# Altium PCB PCB2.PcbDoc
Units mil, origin at the board's own origin, x right, y up, seen from the top; angles counter-clockwise.
Board outline 3121 x 3601 mil, 2 copper layers (Top Layer, Bottom Layer); 116 components, 39 nets, 354 pads, 204 vias.
Unrouted connection lines stored in the file: 45.
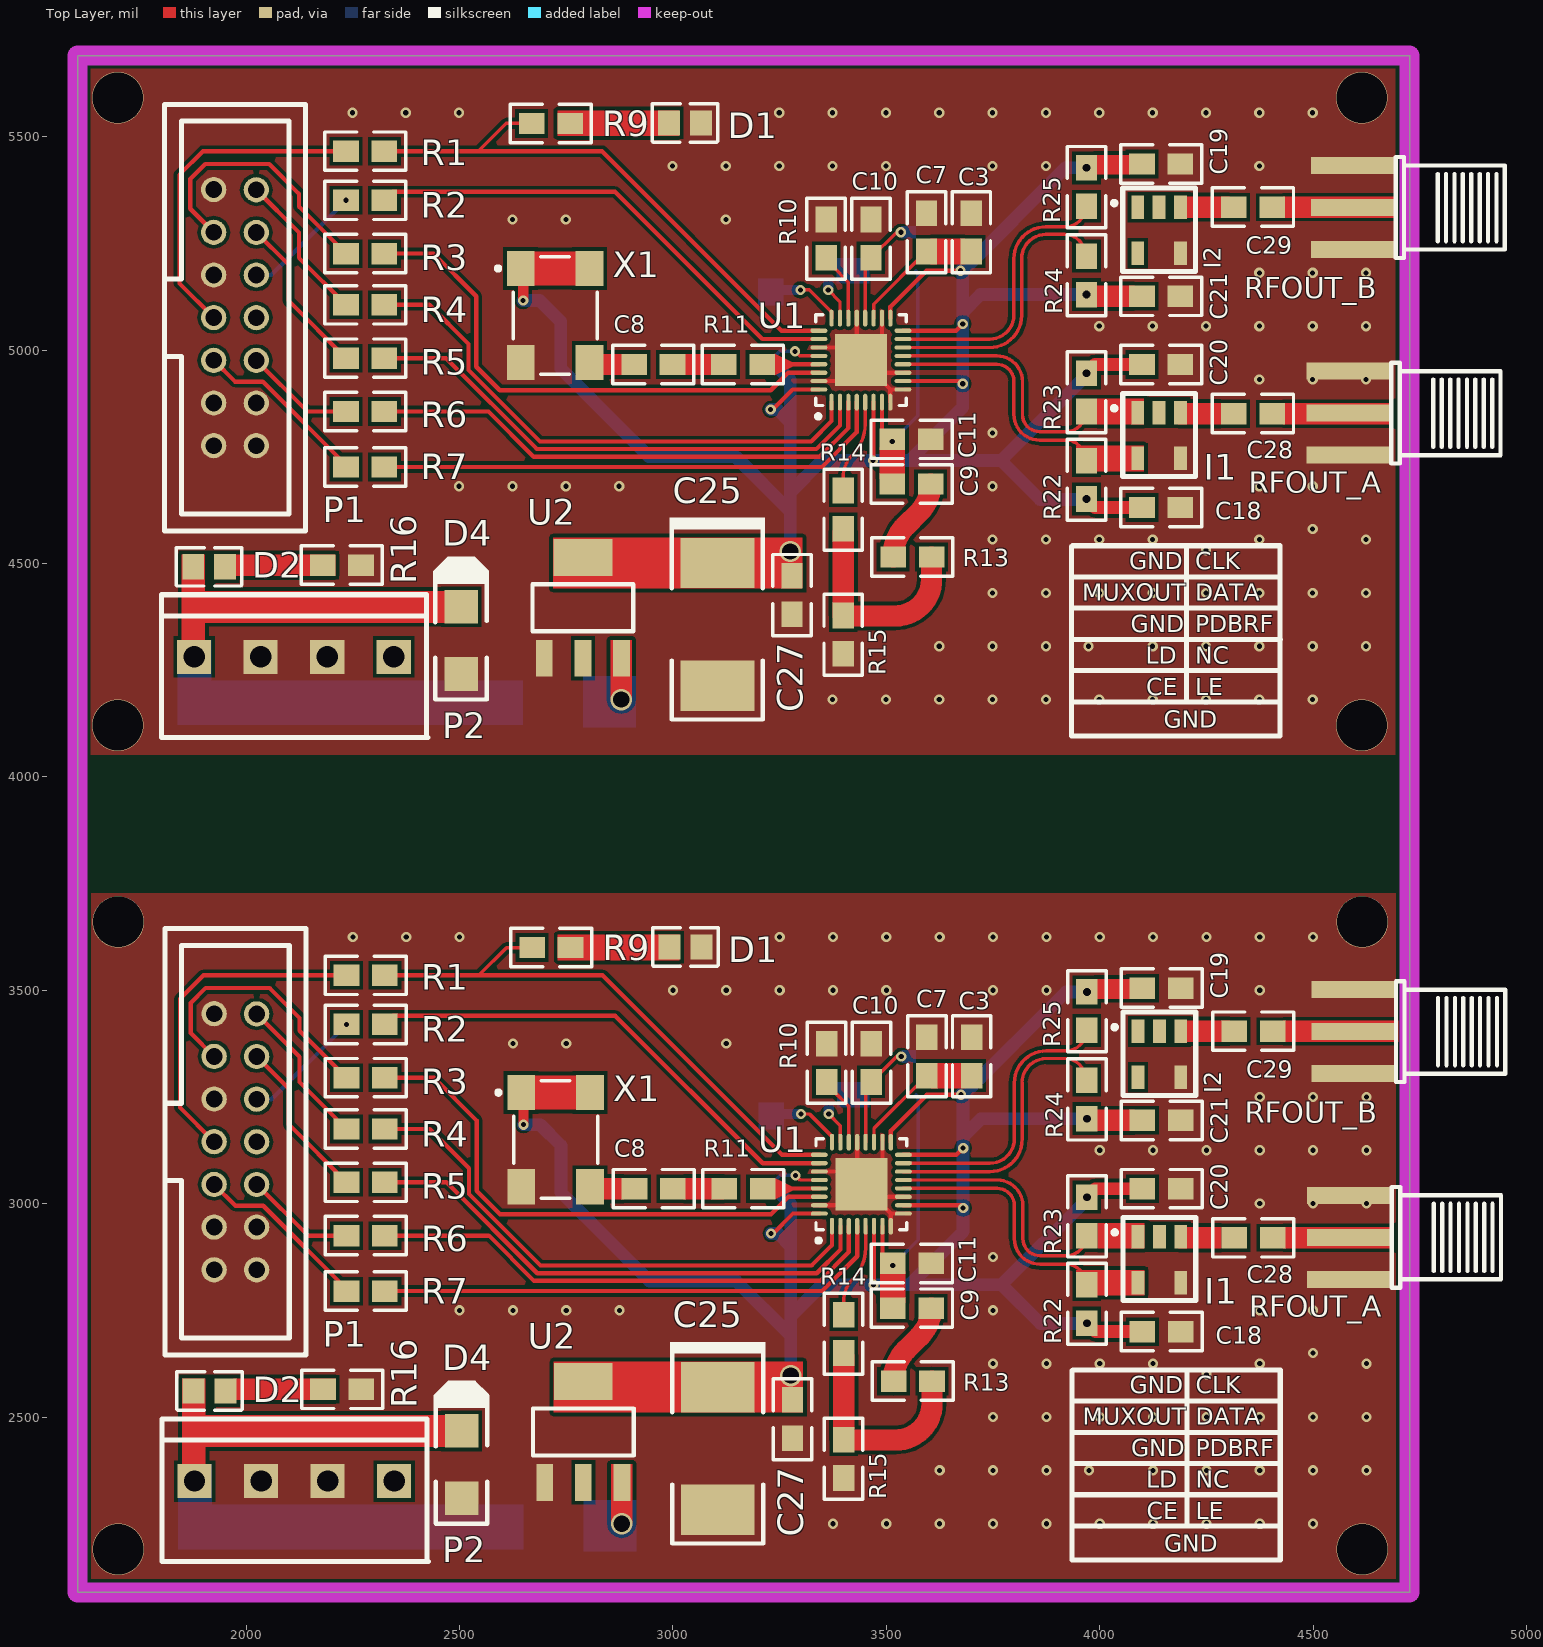
[diagram p0: Top Layer view]
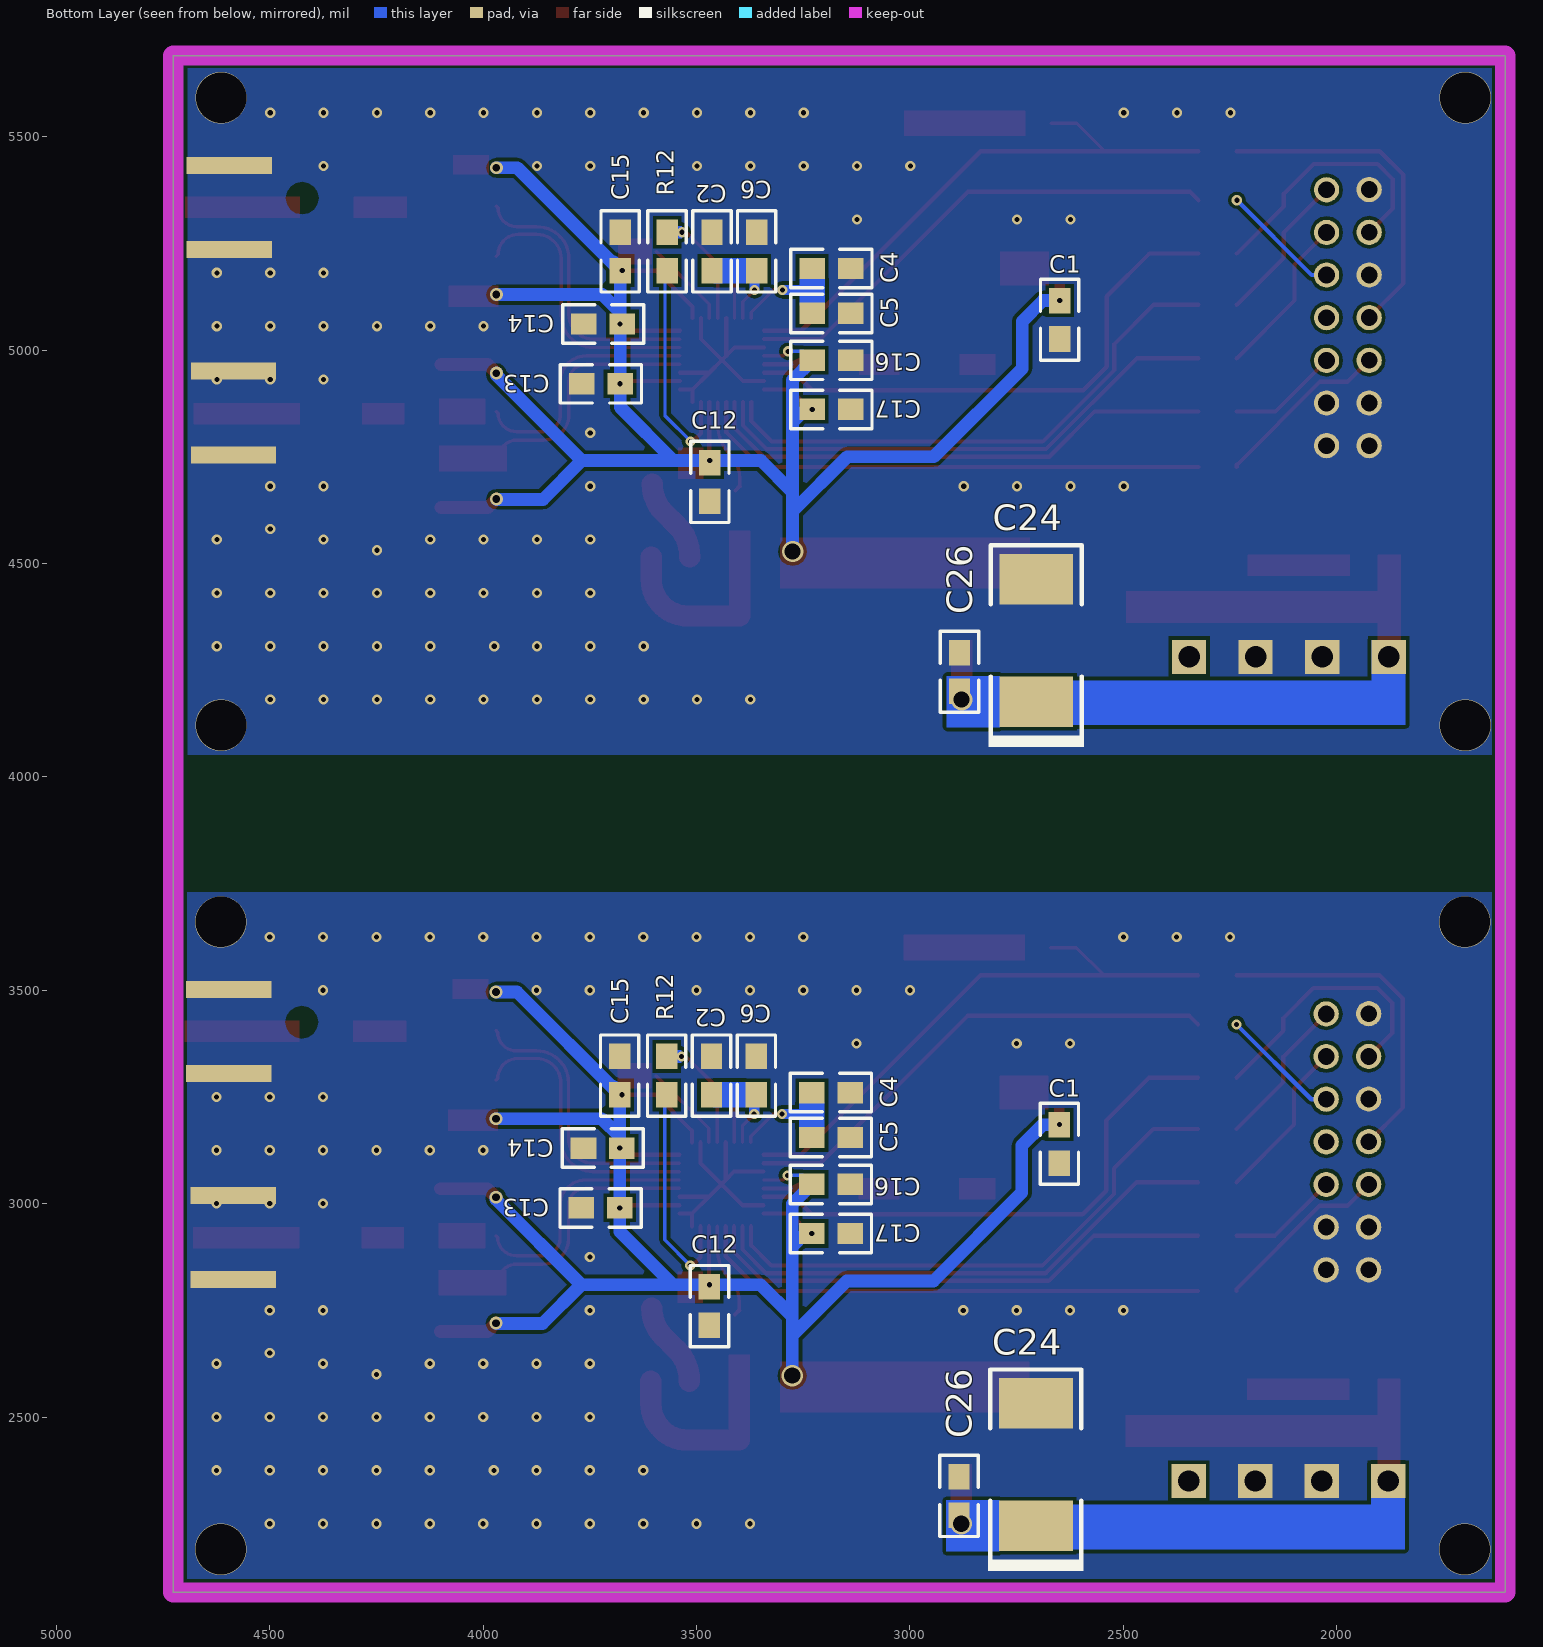
[diagram p1: Bottom Layer view, seen from below]

## Layer stack, top to bottom
Top Solder: solder mask 0.4, Solder Resist, Dk 3.5
Top Layer: signal copper 1.4
Dielectric 1: dielectric 12.6, FR-4, Dk 4.8
Bottom Layer: signal copper 1.4
Bottom Solder: solder mask 0.4, Solder Resist, Dk 3.5

## Board outline
1605,2089 4726,2089 4726,5690 1605,5690

## Design rules (kind name [scope] priority, off if disabled: settings)
Clearance [All] p1: gap=8
DiffPairsRouting [All] p1: maxlimit=10 minlimit=10 mostfreqgap=10 toplayer_minwidth=6 toplayer_maxwidth=15 toplayer_prefwidth=8 bottomlayer_minwidth=6 bottomlayer_maxwidth=15 bottomlayer_prefwidth=8 maxuncoupledlength=500
PlaneConnect [All] p1: planeconnectstyle=Direct reliefexpansion=20 reliefentries=4 reliefconductorwidth=10 reliefairgap=10
PolygonConnect [All] p1: connectstyle=Direct reliefconductorwidth=10 reliefentries=4 polygonreliefangle="90 Angle" airgapwidth=10
RoutingVias [All] p1: holewidth=28 width=50 viastyle="Through Hole" minholewidth=28 minwidth=50 maxholewidth=28 maxwidth=50
SolderMaskExpansion [All] p1: expansion=4
Width [All] p1: maxlimit=50 minlimit=6 preferedwidth=8
28 further rules are at their usual default settings.

## Classes and differential pairs
differential pair RFOUTA: +RFOUTA_P -RFOUTA_N
differential pair RFOUTB: +RFOUTB_P -RFOUTB_N

## Components (designator, comment, footprint, x,y, rotation, side; value= is the part's Value field where it differs from the comment)
C1 "0.1uf" 0805 2649,5026 r90 bottom
C1 "0.1uf" 0805 2650,3095 r90 bottom
C2 "0.1uf" 0805 3464,5276 r270 bottom
C2 "0.1uf" 0805 3465,3345 r270 bottom
C3 "0.1uf" 0805 3699,5321 r270 top
C3 "0.1uf" 0805 3700,3390 r270 top
C4 "0.1uf" 0805 3139,5191 r0 bottom
C4 "0.1uf" 0805 3140,3260 r0 bottom
C5 "100pf" 0805 3139,5086 r0 bottom
C5 "100pf" 0805 3140,3155 r0 bottom
C6 "100pf" 0805 3359,5276 r270 bottom
C6 "100pf" 0805 3360,3345 r270 bottom
C7 "100pf" 0805 3594,5321 r270 top
C7 "100pf" 0805 3595,3390 r270 top
C8 "100pf" 0805 2999,4966 r180 top
C8 "100pf" 0805 3000,3035 r180 top
C9 "39.6nf" 0805 3604,4686 r180 top
C9 "39.6nf" 0805 3605,2755 r180 top
C10 "1.33nf" 0805 3464,5306 r270 top
C10 "1.33nf" 0805 3465,3375 r270 top
C11 "2.91nF" 0805 3604,4791 r180 top
C11 "2.91nF" 0805 3605,2860 r180 top
C12 "100pf" 0805 3469,4646 r90 bottom
C12 "100pf" 0805 3470,2715 r90 bottom
C13 "100pf" 0805 3769,4921 r180 bottom
C13 "100pf" 0805 3770,2990 r180 bottom
C14 "100pf" 0805 3764,5061 r180 bottom
C14 "100pf" 0805 3765,3130 r180 bottom
C15 "100pf" 0805 3679,5276 r270 bottom
C15 "100pf" 0805 3680,3345 r270 bottom
C16 "100pf" 0805 3139,4976 r0 bottom
C16 "100pf" 0805 3140,3045 r0 bottom
C17 "100pf" 0805 3139,4861 r0 bottom
C17 "100pf" 0805 3140,2930 r0 bottom
C18 "100pf" 0805 4189,4631 r180 top
C18 "100pf" 0805 4190,2700 r180 top
C19 "100pf" 0805 4189,5436 r180 top
C19 "100pf" 0805 4190,3505 r180 top
C20 "100pf" 0805 4189,4966 r180 top
C20 "100pf" 0805 4190,3035 r180 top
C21 "100pf" 0805 4189,5126 r180 top
C21 "100pf" 0805 4190,3195 r180 top
C24 "Cap" 7343C-TYPE_D 2704,4176 r270 bottom
C24 "Cap" 7343C-TYPE_D 2705,2245 r270 bottom
C25 "Cap" 7343C-TYPE_D 3104,4501 r90 top
C25 "Cap" 7343C-TYPE_D 3105,2570 r90 top
C26 "100pf" 0805 2884,4291 r270 bottom
C26 "100pf" 0805 2885,2360 r270 bottom
C27 "100pf" 0805 3279,4381 r90 top
C27 "100pf" 0805 3280,2450 r90 top
C28 "1nf" 0805 4314,4851 r0 top
C28 "1nf" 0805 4315,2920 r0 top
C29 "1nf" 0805 4314,5335 r0 top
C29 "1nf" 0805 4315,3404 r0 top
D1 "LED" 0805_s 3049,5546 r0 top
D1 "LED" 0805_s 3050,3615 r0 top
D2 "LED" 0805_s 1934,4506 r0 top
D2 "LED" 0805_s 1935,2575 r0 top
D4 "5.6V" SMA/DO-214AC 2504,4241 r90 top
D4 "5.6V" SMA/DO-214AC 2505,2310 r90 top
I1 "ETC1-1-13TR" SM-22 4074,4718.5 r0 top
I1 "ETC1-1-13TR" SM-22 4075,2787.5 r0 top
I2 "ETC1-1-13TR" SM-22 4074,5199.5 r0 top
I2 "ETC1-1-13TR" SM-22 4075,3268.5 r0 top
P1 "DC-314P" DC3-14P 1808.65,5575.61 r270 top
P1 "DC-314P" DC3-14P 1809.65,3644.61 r270 top
P2 "VH3.96-4A" VH3.96-4P 1801.32,4426.67 r0 top
P2 "VH3.96-4A" VH3.96-4P 1802.32,2495.67 r0 top
R1 "30R" 0805 2234,5466 r0 top
R1 "30R" 0805 2235,3535 r0 top
R2 "30R" 0805 2234,5351 r0 top
R2 "30R" 0805 2235,3420 r0 top
R3 "30R" 0805 2234,5226 r0 top
R3 "30R" 0805 2235,3295 r0 top
R4 "30R" 0805 2234,5106 r0 top
R4 "30R" 0805 2235,3175 r0 top
R5 "30R" 0805 2234,4981 r0 top
R5 "30R" 0805 2235,3050 r0 top
R6 "30R" 0805 2234,4856 r0 top
R6 "30R" 0805 2235,2925 r0 top
R7 "30R" 0805 2234,4726 r0 top
R7 "30R" 0805 2235,2795 r0 top
R9 "1K" 0805 2669,5531 r0 top
R9 "1K" 0805 2670,3600 r0 top
R10 "4.7K" 0805 3359,5216 r90 top
R10 "4.7K" 0805 3360,3285 r90 top
R11 "30R" 0805 3209,4966 r180 top
R11 "30R" 0805 3210,3035 r180 top
R12 "23.0k" 0805 3569,5186 r90 bottom
R12 "23.0k" 0805 3570,3255 r90 bottom
R13 "0" 0805 3606,4515 r180 top
R13 "0" 0805 3607,2584 r180 top
R14 "120R" 0805 3399,4581 r90 top
R14 "120R" 0805 3400,2650 r90 top
R15 "11.3K" 0805 3399,4378 r270 top
R15 "11.3K" 0805 3400,2447 r270 top
R16 "10K" 0805 2269,4496 r180 top
R16 "10K" 0805 2270,2565 r180 top
R22 "49R9" 0805 3969,4741 r270 top
R22 "49R9" 0805 3970,2810 r270 top
R23 "49R9" 0805 3969,4946 r270 top
R23 "49R9" 0805 3970,3015 r270 top
R24 "49R9" 0805 3969,5130 r90 top
R24 "49R9" 0805 3970,3199 r90 top
R25 "49R9" 0805 3969,5427 r270 top
R25 "49R9" 0805 3970,3496 r270 top
RFOUT_A "差分输出" SMA-LYING 4644,4856 r180 top (schematic designator Vo_S1)
RFOUT_A "差分输出" SMA-LYING 4645,2925 r180 top (schematic designator Vo_S1)
RFOUT_B "差分输出" SMA-LYING 4654.06,5337.94 r180 top (schematic designator Vo_S2)
RFOUT_B "差分输出" SMA-LYING 4655.06,3406.94 r180 top (schematic designator Vo_S2)
U1 "ADI-ADF4351-CP-32-2" ADI-CP-32-2_M 3440.57,4976.47 r90 top
U1 "ADI-ADF4351-CP-32-2" ADI-CP-32-2_M 3441.57,3045.47 r90 top
U2 "AMS1117-3.3V" SOT-223 2789,4396 r270 top
U2 "AMS1117-3.3V" SOT-223 2790,2465 r270 top
X1 "XAL-100MHZ" SMD4_7050 2724,5081 r0 top
X1 "XAL-100MHZ" SMD4_7050 2725,3150 r0 top

## Footprints (in the part's own frame and the unit in brackets; to place one, negate y for a bottom-side part, rotate by r counter-clockwise, add the part's x,y. Pads: shape width x height; smd on the part's side, far side on the other; paste and mask are expansions set on the pad)
0805 [mil]
  rect 60x50 smd: 1(0,0) 2(90,0)
  silkscreen extent -50,-45 140,45
0805_s [mm]
  rect 1.3x1.499 smd: 1(0.425,-0.35) 2(-1.475,-0.35)
  silkscreen extent -2.47,-1.49 1.43,0.79
7343C-TYPE_D [mm]
  rect 3x4.4 smd: 1(0,0) 2(-7.3,0)
  silkscreen extent -9.31,-2.84 2.7,2.84
ADI-CP-32-2_M [mm] "QFN, 32-Leads, Body 5x5mm, Pitch 0.5mm, Thermal Pad 3.1x3.1mm, IPC Low Density"
  oval 1x0.25 smd: 1(-2.5,1.75) 2(-2.5,1.25) 3(-2.5,0.75) 4(-2.5,0.25) 5(-2.5,-0.25) 6(-2.5,-0.75) 7(-2.5,-1.25) 8(-2.5,-1.75) 17(2.5,-1.75) 18(2.5,-1.25) 19(2.5,-0.75) 20(2.5,-0.25) 21(2.5,0.25) 22(2.5,0.75) 23(2.5,1.25) 24(2.5,1.75)
  oval 0.25x1 smd: 9(-1.75,-2.5) 10(-1.25,-2.5) 11(-0.75,-2.5) 12(-0.25,-2.5) 13(0.25,-2.5) 14(0.75,-2.5) 15(1.25,-2.5) 16(1.75,-2.5) 25(1.75,2.5) 26(1.25,2.5) 27(0.75,2.5) 28(0.25,2.5) 29(-0.25,2.5) 30(-0.75,2.5) 31(-1.25,2.5) 32(-1.75,2.5)
  rect 3.1x3.1 smd: 33(0,0)
  silkscreen extent -3.47,-2.7 2.7,2.7, body extent -2.55,-2.55 2.55,2.55, height 1
DC3-14P [mm]
  round 1.5 hole 1: 1(5.07,2.93) 2(5.08,5.461) 3(7.61,2.93) 4(7.618,5.461) 5(10.15,2.93) 6(10.157,5.461) 7(12.69,2.93) 8(12.695,5.461) 9(15.23,2.93) 10(15.233,5.461) 11(17.77,2.93) 12(17.772,5.461) 13(20.31,2.93) 14(20.31,5.461)
  silkscreen extent 0,0 25.38,8.4
SM-22 [mil]
  rect 30x55 smd: 1(15,135) 2(65,135) 3(115,135) 4(115,27.5) 5(15,27.5)
  silkscreen extent -45,-15 150,180
SMA-LYING [mm]
  rect 5.08x1.016 smd: 0(1.5,0.1) 1(1.5,2.6) 1(1.5,-2.4)
  rect 5.08x1.016 smd far side: 1(1.5,2.6) 1(1.5,-2.4)
  silkscreen extent -7.5,-2.9 -1,3.1
SMA/DO-214AC [mm]
  rect 2x2 smd: 1(0,0) 2(4,0)
  silkscreen extent -1.52,-1.52 6.86,1.55
SMD4_7050 [mm]
  rect 1.65x2.1 smd: 1(-2.05,2.8) 2(-2.05,-2.8) 3(2.05,-2.8) 4(2.05,2.8)
  silkscreen extent -3.52,-3.5 2.5,3.5
SOT-223 [mm]
  rect 2.2x1 smd: 1(3,-2.3) 2(3,0) 3(3,2.3)
  rect 2.2x3.5 smd: 2(-3,0)
  silkscreen extent -1.4,-3 1.4,3, body extent -3.49,-3.24 3.49,3.24, height 1.64
VH3.96-4P [mil]
  rect 80x80 hole 50: 1(76.77,-145.67) 2(232.68,-145.67) 3(388.58,-145.67) 4(544.49,-145.67)
  silkscreen extent 0,-335 625,0

## Part data
C1 C1 C2 C2 C3 C3 C4 C4 C5 C5 C6 C6 C7 C7 C8 C8 C9 C9 C10 C10 C11 C11 C12 C12 C13 C13 C14 C14 C15 C15 C16 C16 C17 C17 C18 C18 C19 C19 C20 C20 C21 C21 C26 C26 C27 C27 C28 C28 C29 C29: library part Cap
C24 C24 C25 C25: library part "Tantalium Cap"
D4 D4: library part 肖特基-5.6V
P1 P1: library part DC3-14P
R1 R1 R2 R2 R3 R3 R4 R4 R5 R5 R6 R6 R7 R7 R9 R9 R10 R10 R11 R11 R12 R12 R13 R13 R14 R14 R15 R15 R16 R16 R22 R22 R23 R23 R24 R24 R25 R25: library part Res
RFOUT_A RFOUT_A RFOUT_B RFOUT_B: library part SMA
X1 X1: library part XAL

## Via types
v1: diameter 24, hole 12, Top Layer to Bottom Layer, 184 vias
v2: diameter 120.08, hole 118.11, Top Layer to Bottom Layer, 8 vias
v3: diameter 30, hole 18, Top Layer to Bottom Layer, 8 vias
v4: diameter 50, hole 38, Top Layer to Bottom Layer, 4 vias

## Nets (pads, with @x,y where several pads share a name; then routed paths per layer and width w, separated by ;. In a path a pad name is that pad's centre, name@x,y a point inside that pad or via, vN(x,y) a via of type N, cw(c..) or ccw(c..) an arc to the next point about the centre after c; other vN are vias at no path point)
3.3V: C1.2 C12.2 C13.2 C14.2 C15.2 C16.2 C17.2 C18.2 C19.2 C20.2 C21.2 C25.1 C27.2 R22.2 R23.1 R24.1 R25.1 U1.6 U1.10 U1.16 U1.17 U1.28 U1.32 U2.2 X1.1 X1.4 | length 9764.1
  Top Layer w8: v1(3286,4997) 3296.69,4986.31 U1.28@3342.15,4986.31 ; v1(3287,3066) 3297.69,3055.31 U1.28@3343.15,3055.31
  Top Layer w10: v1(3229,4861) 3234,4861 3280.57,4907.57 U1.32@3342.15,4907.57 ; v1(3230,2930) 3235,2930 3281.57,2976.57 U1.32@3343.15,2976.57 ; v1(3469,4741) 3470.1,4742.1 U1.6@3470.1,4878.05 ; v1(3470,2810) 3471.1,2811.1 U1.6@3471.1,2947.05 ; U1.17@3509.47,5074.9 3509.47,5101.47 3594,5186 v1(3674,5186) ; U1.17@3510.47,3143.9 3510.47,3170.47 3595,3255 v1(3675,3255) ; U1.10@3539,4927.26 3672.74,4927.26 v1(3679,4921) ; U1.16@3539,5045.37 3663.37,5045.37 v1(3679,5061) ; U1.10@3540,2996.26 3673.74,2996.26 v1(3680,2990) ; U1.16@3540,3114.37 3664.37,3114.37 v1(3680,3130)
  Top Layer w30: v3(3969,4651) 3989,4631 C18.2@4099,4631 ; v3(3969,4946) 3989,4966 C20.2@4099,4966 ; v3(3970,2720) 3990,2700 C18.2@4100,2700 ; v3(3970,3015) 3990,3035 C20.2@4100,3035
  Bottom Layer w8: C16.2@3229,4976 3250,4997 v1(3286,4997) ; C16.2@3230,3045 3251,3066 v1(3287,3066)
  Bottom Layer w30: v1(2649,5116) 2688,5116 2737,5067 2737,4957 2944,4750 3147,4750 3275,4622 ; v1(2650,3185) 2689,3185 2738,3136 2738,3026 2945,2819 3148,2819 3276,2691 ; v1(3229,4861) 3245,4861 3275,4831 ; C16.2@3229,4976 3275,4930 3275,4831 ; v1(3230,2930) 3246,2930 3276,2900 ; C16.2@3230,3045 3276,2999 3276,2900 ; v4(3275,4528) 3275,4622 ; v4(3276,2597) 3276,2691 ; C15.2@3679,5186 3920,5427 v3(3969,5427) ; C15.2@3680,3255 3921,3496 v3(3970,3496) ; C15.2@3694,5206 v1(3674,5186) 3679,5181 3679,5088 ; C15.2@3695,3275 v1(3675,3255) 3680,3250 3680,3157 ; v3@3968,4650 3860,4650 3769,4741 ; v3@3969,2719 3861,2719 3770,2810 ; v3(3969,4946) 3969,4941 3769,4741 ; v3(3969,5130) 3721,5130 3679,5088 ; v3(3970,3015) 3970,3010 3770,2810 ; v3(3970,3199) 3722,3199 3680,3157 ; 3275,4622 3275,4667 ; 3275,4667 3275,4831 ; 3275,4667 3349,4741 v1(3469,4741) 3554,4741 ; 3276,2691 3276,2736 ; 3276,2736 3350,2810 v1(3470,2810) 3555,2810 ; 3276,2736 3276,2900 ; 3554,4741 3769,4741 ; 3554,4741 3679,4866 v1(3679,4921) v1(3679,5061) 3679,5088 ; 3555,2810 3680,2935 v1(3680,2990) v1(3680,3130) 3680,3157 ; 3555,2810 3770,2810
CE: R7.2 U1.4 | length 2421.8
  Top Layer w10: R7.2@2324,4726 3349,4726 3430.73,4807.73 U1.4@3430.73,4878.05 ; R7.2@2325,2795 3350,2795 3431.73,2876.73 U1.4@3431.73,2947.05
"CE D": P1.9 R7.1 | length 833
  Top Layer w10: P1.9@1924,4976 1974,4926 2039,4926 2234,4731 R7.1@2234,4726 ; P1.9@1925,3045 1975,2995 2040,2995 2235,2800 R7.1@2235,2795
CLK: R4.2 U1.1 | length 2559.5
  Top Layer w10: R4.2@2324,5106 2429,5106 2521,5014 2521,4953.54 2688.54,4786 3324,4786 3371.68,4833.68 U1.1@3371.68,4878.05 ; R4.2@2325,3175 2430,3175 2522,3083 2522,3022.54 2689.54,2855 3325,2855 3372.68,2902.68 U1.1@3372.68,2947.05
"CLK D": P1.2 R4.1 | length 713.5
  Top Layer w10: P1.2@2023.65,5375.61 2124,5275.25 2124,5216 R4.1@2234,5106 ; P1.2@2024.65,3444.61 2125,3344.25 2125,3285 R4.1@2235,3175
CP: C9.2 C11.2 R12.1 U1.7 | length 1069.7
  Top Layer w10: U1.7@3489.79,4878.05 3489.79,4805.21 3504,4791 3514,4791 C11.2@3519,4791 ; U1.7@3490.79,2947.05 3490.79,2874.21 3505,2860 3515,2860 C11.2@3520,2860
  Bottom Layer w8: v1(3514,4786) 3574,4846 3574,5181 R12.1@3569,5186 ; v1(3515,2855) 3575,2915 3575,3250 R12.1@3570,3255
DATA: R5.2 U1.2 | length 2466.4
  Top Layer w10: R5.2@2324,4981 2468.09,4981 2681.09,4768 3336,4768 3391.36,4823.36 U1.2@3391.36,4878.05 ; R5.2@2325,3050 2469.09,3050 2682.09,2837 3337,2837 3392.36,2892.36 U1.2@3392.36,2947.05
"DATA D": P1.4 R5.1 | length 763.6
  Top Layer w10: P1.4@2023.65,5275.67 2099,5200.32 2099,5116 R5.1@2234,4981 ; P1.4@2024.65,3344.67 2100,3269.32 2100,3185 R5.1@2235,3050
GND: C1.1 C2.1 C3.1 C4.1 C5.1 C6.1 C7.1 C10.1 C11.1 C12.1 C13.1 C14.1 C15.1 C16.1 C17.1 C18.1 C19.1 C20.1 C21.1 C24.2 C25.2 C26.1 C27.1 D1.1 D4.1 I1.4 I2.4 P1.1 P1.5 P1.11 P1.12 P1.13 P1.14 P2.2 P2.3 R10.2 R15.2 R16.1 RFOUT_A.1 RFOUT_B.1 U1.8 U1.9 U1.11 U1.18 U1.21 U1.27 U1.31 U1.33 U2.1 X1.2 | length 1324.5
  Top Layer w10: U1.31@3342.15,4927.26 3391.36,4927.26 U1.33@3440.57,4976.47 ; U1.27@3342.15,5006 3411.05,5006 U1.33@3430.73,4986.31 ; U1.31@3343.15,2996.26 3392.36,2996.26 U1.33@3441.57,3045.47 ; U1.27@3343.15,3075 3412.05,3075 U1.33@3431.73,3055.31 ; U1.21@3430.73,5074.9 U1.33@3430.73,4986.31 ; U1.21@3431.73,3143.9 U1.33@3431.73,3055.31 ; U1.18@3489.79,5074.9 3489.79,5025.69 U1.33@3440.57,4976.47 ; U1.18@3490.79,3143.9 3490.79,3094.68 U1.33@3441.57,3045.47 ; U1.8@3509.47,4878.05 3509.47,4907.57 ; U1.8@3510.47,2947.05 3510.47,2976.57 ; U1.9@3539,4907.57 3509.47,4907.57 ; U1.11@3539,4946.94 U1.33@3470.1,4946.94 ; U1.9@3540,2976.57 3510.47,2976.57 ; U1.11@3540,3015.94 U1.33@3471.1,3015.94 ; U1.33@3430.73,4986.31 U1.33@3440.57,4976.47 ; U1.33@3431.73,3055.31 U1.33@3441.57,3045.47 ; U1.33@3440.57,4976.47 U1.33@3470.1,4946.94 ; U1.33@3441.57,3045.47 U1.33@3471.1,3015.94 ; U1.33@3470.1,4946.94 3509.47,4907.57 ; U1.33@3471.1,3015.94 3510.47,2976.57
  other v1: 3375,2250 3500,2250 3625,2250 3750,2250 3875,2250 4000,2250 4125,2250 4250,2250 4375,2250 4500,2250 3625,2375 3750,2375 3875,2375 3975,2375 4125,2375 4250,2375 4375,2375 4500,2375 4625,2375 3750,2500 3875,2500 4000,2500 4125,2500 4250,2500 4375,2500 4500,2500 4625,2500 4250,2600 3750,2625 3875,2625 4000,2625 4125,2625 4375,2625 4625,2625 4500,2650 2500,2750 2625,2750 2750,2750 2875,2750 3750,2750 4375,2750 4500,2750 3750,2875 4375,3000 4500,3000 4625,3000 4000,3125 4125,3125 4250,3125 4375,3125 4500,3125 4625,3125 4375,3250 4500,3250 4625,3250 2625,3375 2750,3375 3125,3375 3000,3500 3125,3500 3250,3500 3375,3500 3500,3500 3750,3500 3875,3500 4375,3500 2250,3625 2375,3625 2500,3625 3250,3625 3375,3625 3500,3625 3625,3625 3750,3625 3875,3625 4000,3625 4125,3625 4250,3625 4375,3625 4500,3625 3374,4181 3499,4181 3624,4181 3749,4181 3874,4181 3999,4181 4124,4181 4249,4181 4374,4181 4499,4181 3624,4306 3749,4306 3874,4306 3974,4306 4124,4306 4249,4306 4374,4306 4499,4306 4624,4306 3749,4431 3874,4431 3999,4431 4124,4431 4249,4431 4374,4431 4499,4431 4624,4431 4249,4531 3749,4556 3874,4556 3999,4556 4124,4556 4374,4556 4624,4556 4499,4581 2499,4681 2624,4681 2749,4681 2874,4681 3749,4681 4374,4681 4499,4681 3749,4806 4374,4931 4499,4931 4624,4931 3999,5056 4124,5056 4249,5056 4374,5056 4499,5056 4624,5056 4374,5181 4499,5181 4624,5181 2624,5306 2749,5306 3124,5306 2999,5431 3124,5431 3249,5431 3374,5431 3499,5431 3749,5431 3874,5431 4374,5431 2249,5556 2374,5556 2499,5556 3249,5556 3374,5556 3499,5556 3624,5556 3749,5556 3874,5556 3999,5556 4124,5556 4249,5556 4374,5556 4499,5556
  other v2: 1700,2190 4615,2190 1700,3660 4615,3660 1699,4121 4614,4121 1699,5591 4614,5591
LD: R1.2 R9.1 U1.25 | length 2688.6
  Top Layer w8: 2544,5466 2609,5531 R9.1@2669,5531 ; 2545,3535 2610,3600 R9.1@2670,3600
  Top Layer w10: R1.2@2324,5466 2544,5466 2834,5466 3254.63,5045.37 U1.25@3342.15,5045.37 ; R1.2@2325,3535 2545,3535 2835,3535 3255.63,3114.37 U1.25@3343.15,3114.37
"LD D": P1.7 R1.1 | length 1561.8
  Top Layer w10: P1.7@1924,5076 1844,5156 1844,5411 1899,5466 R1.1@2234,5466 ; P1.7@1925,3145 1845,3225 1845,3480 1900,3535 R1.1@2235,3535
LE: R6.2 U1.3 | length 2438.8
  Top Layer w10: R6.2@2324,4856 2567.63,4856 2673.63,4750 3343.46,4750 3411.05,4817.59 U1.3@3411.05,4878.05 ; R6.2@2325,2925 2568.63,2925 2674.63,2819 3344.46,2819 3412.05,2886.59 U1.3@3412.05,2947.05
"LE D": P1.10 R6.1 | length 520
  Top Layer w10: P1.10@2023.65,4975.87 2143.51,4856 R6.1@2234,4856 ; P1.10@2024.65,3044.87 2144.51,2925 R6.1@2235,2925
MUXOUT: R3.2 U1.30 | length 2528.6
  Top Layer w10: R3.2@2324,5226 2439,5226 2539,5126 2539,4961 2594,4906 3229,4906 3269.94,4946.94 U1.30@3342.15,4946.94 ; R3.2@2325,3295 2440,3295 2540,3195 2540,3030 2595,2975 3230,2975 3270.94,3015.94 U1.30@3343.15,3015.94
"MUXOUT D": P1.3 R3.1 | length 1263.7
  Top Layer w10: P1.3@1924,5276 1869,5331 1869,5401 1904,5436 2054,5436 2124,5366 2124,5336 R3.1@2234,5226 ; P1.3@1925,3345 1870,3400 1870,3470 1905,3505 2055,3505 2125,3435 2125,3405 R3.1@2235,3295
NetC8_1: C8.1 R11.2
NetC8_2: C8.2 X1.3
NetC9_1: C9.1 R13.2 | length 398.2
  Top Layer w50: R13.2@3516,4515 3516,4517.58 cw(c3616,4517.58) 3545.29,4588.29 3576.42,4619.42 ccw(c3509.85,4686) C9.1@3604,4686 ; R13.2@3517,2584 3517,2586.58 cw(c3617,2586.58) 3546.29,2657.29 3577.42,2688.42 ccw(c3510.85,2755) C9.1@3605,2755
NetC24_1: C24.1 C26.2 D2.2 D4.2 P2.1 U2.3
  other v4: 2880,2250 2879,4181
NetC28_1: C28.1 I1.3
NetC28_2: C28.2 RFOUT_A.0
NetC29_1: C29.1 I2.3
NetC29_2: C29.2 RFOUT_B.0
NetD1_2: D1.2 R9.2
NetD2_1: D2.1 R16.2
NetR13_1: R13.1 R14.1 R15.1 | length 618.2
  Top Layer w50: R15.1@3399,4378 ccw(c3400,4378) 3400,4377 3521,4377 ccw(c3521,4462) 3606,4462 R13.1@3606,4515 ; R15.1@3400,2447 ccw(c3401,2447) 3401,2446 3522,2446 ccw(c3522,2531) 3607,2531 R13.1@3607,2584
PDBRF: R2.2 U1.26 | length 2338.9
  Top Layer w10: R2.2@2324,5351 2344,5371 2864,5371 3209.32,5025.69 U1.26@3342.15,5025.69 ; R2.2@2325,3420 2345,3440 2865,3440 3210.32,3094.68 U1.26@3343.15,3094.68
"PDBRF D": P1.6 R2.1 | length 565.9
  Bottom Layer w10: P1.6@2023.65,5175.74 2058.74,5175.74 v1(2234,5351) ; P1.6@2024.65,3244.74 2059.74,3244.74 v1(2235,3420)
REFIN: R11.1 U1.29 | length 266.8
  Top Layer w10: R11.1@3209,4966 3209.63,4966.63 U1.29@3342.15,4966.63 ; R11.1@3210,3035 3210.63,3035.63 U1.29@3343.15,3035.63
RFOUTA_N: I1.1 R23.2 U1.13 | length 1198.7
  Top Layer w8: U1.13@3539,4986.31 3756.69,4986.31 ; U1.13@3540,3055.31 3757.69,3055.31 ; 3759,4986.31 cw(c3759,4926.31) 3819,4926.31 3819,4849 ccw(c3859,4849) 3859,4809 3922,4809 ccw(c3922,4852) 3965,4852 3969,4856 ccw(c3978.66,4846.34) 3965,4846.34 R23.2@3965,4846 ; 3760,3055.32 cw(c3760,2995.32) 3820,2995.32 3820,2918 ccw(c3860,2918) 3860,2878 3923,2878 ccw(c3923,2921) 3966,2921 3970,2925 ccw(c3979.66,2915.34) 3966,2915.34 R23.2@3966,2915
RFOUTA_P: I1.5 R22.1 U1.12 | length 1203.2
  Top Layer w8: U1.12@3539,4966.63 3758.37,4966.63 ; U1.12@3540,3035.63 3759.37,3035.63 ; 3759,4966.63 cw(c3759,4926.63) 3799,4926.63 3799,4849 ccw(c3859,4849) 3859,4789 3921,4789 cw(c3921,4745) 3965,4745 3969,4741 ccw(c3959.34,4731.34) R22.1@3959.34,4745 ; 3760,3035.63 cw(c3760,2995.63) 3800,2995.63 3800,2918 ccw(c3860,2918) 3860,2858 3922,2858 cw(c3922,2814) 3966,2814 3970,2810 ccw(c3960.34,2800.34) R22.1@3960.34,2814
RFOUTB_N: I2.1 R25.2 U1.15 | length 1336.1
  Top Layer w8: U1.15@3539,5025.69 3738.93,5025.69 ; U1.15@3540,3094.68 3739.93,3094.68 ; 3742,5025.69 ccw(c3742,5082.69) 3799,5082.69 ; 3743,3094.68 ccw(c3743,3151.68) 3800,3151.68 ; 3799,5085.75 3799,5214 cw(c3874,5214) 3874,5289 3921,5289 ccw(c3921,5333) 3965,5333 3969,5337 ccw(c3978.66,5327.34) R25.2@3965,5327.34 ; 3800,3154.75 3800,3283 cw(c3875,3283) 3875,3358 3922,3358 ccw(c3922,3402) 3966,3402 3970,3406 ccw(c3979.66,3396.34) R25.2@3966,3396.34
RFOUTB_P: I2.5 R24.2 U1.14 | length 1333.7
  Top Layer w8: U1.14@3539,5006 3742,5006 ccw(c3742,5081) 3817,5081 3817,5214 cw(c3874,5214) 3874,5271 3918,5271 cw(c3918,5224) 3965,5224 R24.2@3969,5220 ; U1.14@3540,3075 3743,3075 ccw(c3743,3150) 3818,3150 3818,3283 cw(c3875,3283) 3875,3340 3919,3340 cw(c3919,3293) 3966,3293 R24.2@3970,3289
RSET: R10.1 U1.22 | length 272.9
  Top Layer w8: R10.1@3374,5196 3411.05,5158.95 U1.22@3411.05,5074.9 ; R10.1@3375,3265 3412.05,3227.95 U1.22@3412.05,3143.9
SW: R14.2 U1.5 | length 449.9
  Top Layer w8: R14.2@3399,4681 3399,4701.71 cw(c3474.55,4701.71) 3421.13,4755.13 ccw(c3350.42,4825.84) 3450.42,4825.84 U1.5@3450.42,4878.05 ; R14.2@3400,2750 3400,2770.71 cw(c3475.55,2770.71) 3422.13,2824.13 ccw(c3351.42,2894.84) 3451.42,2894.84 U1.5@3451.42,2947.05
  Top Layer w10: R14.2@3399,4681 R14.2@3409,4671 ; R14.2@3400,2750 R14.2@3410,2740
TEMP: C3.2 C7.2 U1.19 | length 414.8
  Top Layer w8: U1.19@3470.1,5074.9 3470.1,5107.1 C7.2@3594,5231 ; U1.19@3471.1,3143.9 3471.1,3176.1 C7.2@3595,3300
VCOM: C2.2 C6.2 U1.23 | length 154.9
  Top Layer w8: v1(3364,5141) 3391.36,5113.64 U1.23@3391.36,5074.9 ; v1(3365,3210) 3392.36,3182.64 U1.23@3392.36,3143.9
VREF: C4.2 C5.2 U1.24 | length 215.8
  Top Layer w8: v1(3299,5141) 3319,5141 3371.68,5088.32 U1.24@3371.68,5074.9 ; v1(3300,3210) 3320,3210 3372.68,3157.32 U1.24@3372.68,3143.9
VTUNE: C10.2 R12.2 U1.20 | length 483.2
  Top Layer w8: U1.20@3450.42,5074.9 3450.42,5202.42 3464,5216 3524,5276 v1(3534,5276) ; U1.20@3451.42,3143.9 3451.42,3271.42 3465,3285 3525,3345 v1(3535,3345)
pads on no net: I1.2 I2.2 P1.8 P2.4

## Polygon pours and split planes (outlines as drawn)
GND on Bottom Layer "Top Layer-No Net" (solid, pour order 34): 1604,5693 1604,4020 4725,4020 4725,5693
GND on Bottom Layer "Top Layer-No Net" (solid, pour order 12): 1605,3762 1605,2089 4726,2089 4726,3762
GND on Top Layer "Top Layer-No Net" (solid, pour order 36): 1604,4020 4725,4020 4725,5691 1605,5691 cw(c1605,5692) 1604,5692
GND on Top Layer "Top Layer-No Net" (solid, pour order 20): 1605,2089 4726,2089 4726,3760 1606,3760 cw(c1606,3761) 1605,3761

## Keep-outs
Keep-Out Layer:
  the board outline again, w47.24

## Other copper
Top Layer:
  rectangle net NetC29_2: 4429,5310 4699,5360
  rectangle net NetC29_1: 4179,5310 4304,5360
  rectangle net 3.3V: 3986,5411 4071,5457
  rectangle net 3.3V: 3964,5101 4081,5151
  rectangle net NetR13_1: 3374,4378 3424,4577
  rectangle net CP: 3484,4698 3544,4772
  rectangle net 3.3V: 2637,5116 2661,5155
  rectangle net NetD1_2: 2729,5501 3014,5561
  rectangle net 3.3V: 2674,5151 2789,5231
  rectangle net NetC8_2: 2799,4941 2884,4991
  rectangle net NetC8_1: 3024,4941 3119,4991
  rectangle net NetC28_1: 4184,4826 4284,4876
  rectangle net NetC28_2: 4429,4826 4679,4876
  rectangle net NetC24_1: 1849,4286 1904,4521
  rectangle net NetD2_1: 1969,4471 2209,4521
  rectangle net NetC24_1: 1864,4361 2494,4436
  rectangle net NetC24_1: 2854,4181 2904,4321
  rectangle net 3.3V: 2719,4441 3189,4561
  rectangle net 3.3V: 3189,4441 3304,4561
  rectangle net TEMP: 3604,5201 3684,5261
  rectangle net RFOUTA_P: 3944,4716 4104,4776
  rectangle net RFOUTA_N: 3994,4826 4104,4886
  rectangle net RFOUTA_N: 3995,2895 4105,2955
  rectangle net RFOUTA_P: 3945,2785 4105,2845
  rectangle net TEMP: 3605,3270 3685,3330
  rectangle net 3.3V: 3190,2510 3305,2630
  rectangle net 3.3V: 2720,2510 3190,2630
  rectangle net NetC24_1: 2855,2250 2905,2390
  rectangle net NetC24_1: 1865,2430 2495,2505
  rectangle net NetD2_1: 1970,2540 2210,2590
  rectangle net NetC24_1: 1850,2355 1905,2590
  rectangle net NetC28_2: 4430,2895 4680,2945
  rectangle net NetC28_1: 4185,2895 4285,2945
  rectangle net NetC8_1: 3025,3010 3120,3060
  rectangle net NetC8_2: 2800,3010 2885,3060
  rectangle net 3.3V: 2675,3220 2790,3300
  rectangle net NetD1_2: 2730,3570 3015,3630
  rectangle net 3.3V: 2638,3185 2662,3224
  rectangle net CP: 3485,2767 3545,2841
  rectangle net NetR13_1: 3375,2447 3425,2646
  rectangle net 3.3V: 3965,3170 4082,3220
  rectangle net 3.3V: 3987,3480 4072,3526
  rectangle net NetC29_1: 4180,3379 4305,3429
  rectangle net NetC29_2: 4430,3379 4700,3429
  region net REFIN: 3239,4991 3279,4971 3279,4961 3239,4941
  region net REFIN: 3240,3060 3280,3040 3280,3030 3240,3010
Bottom Layer:
  rectangle net VCOM: 3352,5140 3376,5166
  rectangle net VREF: 3254,5129 3299,5153
  rectangle net VCOM: 3383,5156 3460,5216
  rectangle net VREF: 3199,5105 3259,5168
  rectangle net NetC24_1: 1839,4121 1919,4321
  rectangle net NetC24_1: 1919,4121 2649,4226
  rectangle net NetC24_1: 2789,4116 2914,4236
  rectangle net VTUNE: 3534,5261 3569,5291
  rectangle net VTUNE: 3535,3330 3570,3360
  rectangle net NetC24_1: 2790,2185 2915,2305
  rectangle net NetC24_1: 1920,2190 2650,2295
  rectangle net NetC24_1: 1840,2190 1920,2390
  rectangle net VREF: 3200,3174 3260,3237
  rectangle net VCOM: 3384,3225 3461,3285
  rectangle net VREF: 3255,3198 3300,3222
  rectangle net VCOM: 3353,3209 3377,3235

## Silkscreen, mask and mechanical layers (free items; w line width, h text height)
Top Overlay:
  lines w11.81: 3935,4468.34 4422,4468.34 ; 3936,2537.34 4423,2537.34 ; 3936,4175.68 4204,4175.68 4419.96,4175.68 ; 3936,4395.17 4421,4395.17 ; 3936,4541.5 3934,4539.5 3934,4108.5 3934,4095.5 4422,4095.5 4422,4108.5 4422,4541.5 4207,4541.5 3939,4541.5 ; 3937,2244.68 4205,2244.68 4420.96,2244.68 ; 3937,2464.17 4422,2464.17 ; 3937,2610.5 3935,2608.5 3935,2177.5 3935,2164.5 4423,2164.5 4423,2177.5 4423,2610.5 4208,2610.5 3940,2610.5 ; 3937,4248.84 4422,4248.84 ; 3938,2317.84 4423,2317.84 ; 3940,4322.01 4423,4322.01 ; 3941,2391.01 4424,2391.01 ; 4203,4175.68 4203,4541.5 ; 4204,2244.68 4204,2610.5
  text "GND" at 4068.96,4486.5 h40
  text "CLK" at 4224,4486.5 h40
  text "MUXOUT" at 3958.96,4412.75 h40
  text "DATA" at 4224,4412.75 h40
  text "GND" at 4072.96,4339 h40
  text "PDBRF" at 4224,4339 h40
  text "LD" at 4107.96,4265.25 h40
  text "NC" at 4224,4265.25 h40
  text "CE" at 4108.96,4191.5 h40
  text "LE" at 4224,4191.5 h40
  text "GND" at 4149.96,4115.5 h40
  text "GND" at 4069.96,2555.5 h40
  text "CLK" at 4225,2555.5 h40
  text "MUXOUT" at 3959.96,2481.75 h40
  text "DATA" at 4225,2481.75 h40
  text "GND" at 4073.96,2408 h40
  text "PDBRF" at 4225,2408 h40
  text "LD" at 4108.96,2334.25 h40
  text "NC" at 4225,2334.25 h40
  text "CE" at 4109.96,2260.5 h40
  text "LE" at 4225,2260.5 h40
  text "GND" at 4150.96,2184.5 h40